# Altium PCB IR驱动.PcbDoc
Units mm, origin at the board's own origin, x right, y up, seen from the top; angles counter-clockwise.
Board outline 62.52 x 83.44 mm, 2 copper layers (Top Layer, Bottom Layer); 28 components, 77 nets, 84 pads, 10 vias.
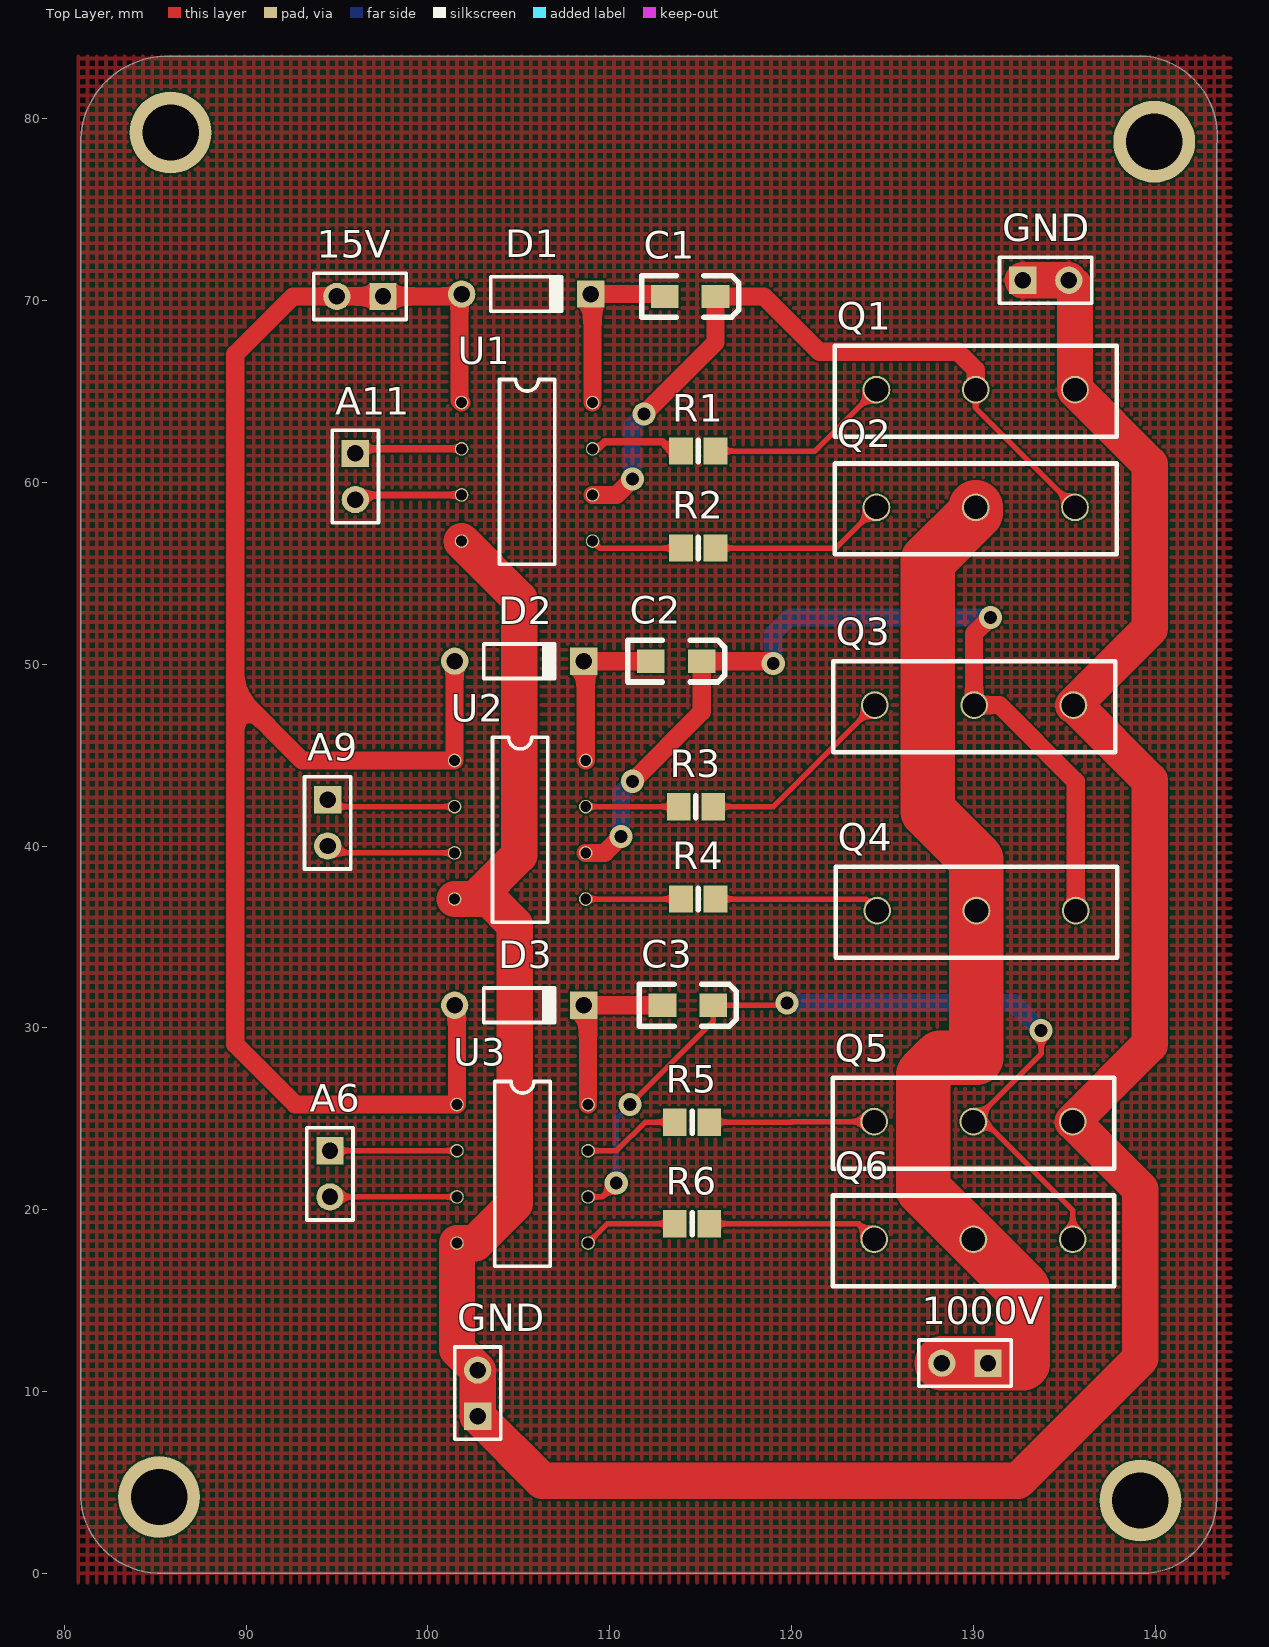
[diagram p0: Top Layer view]
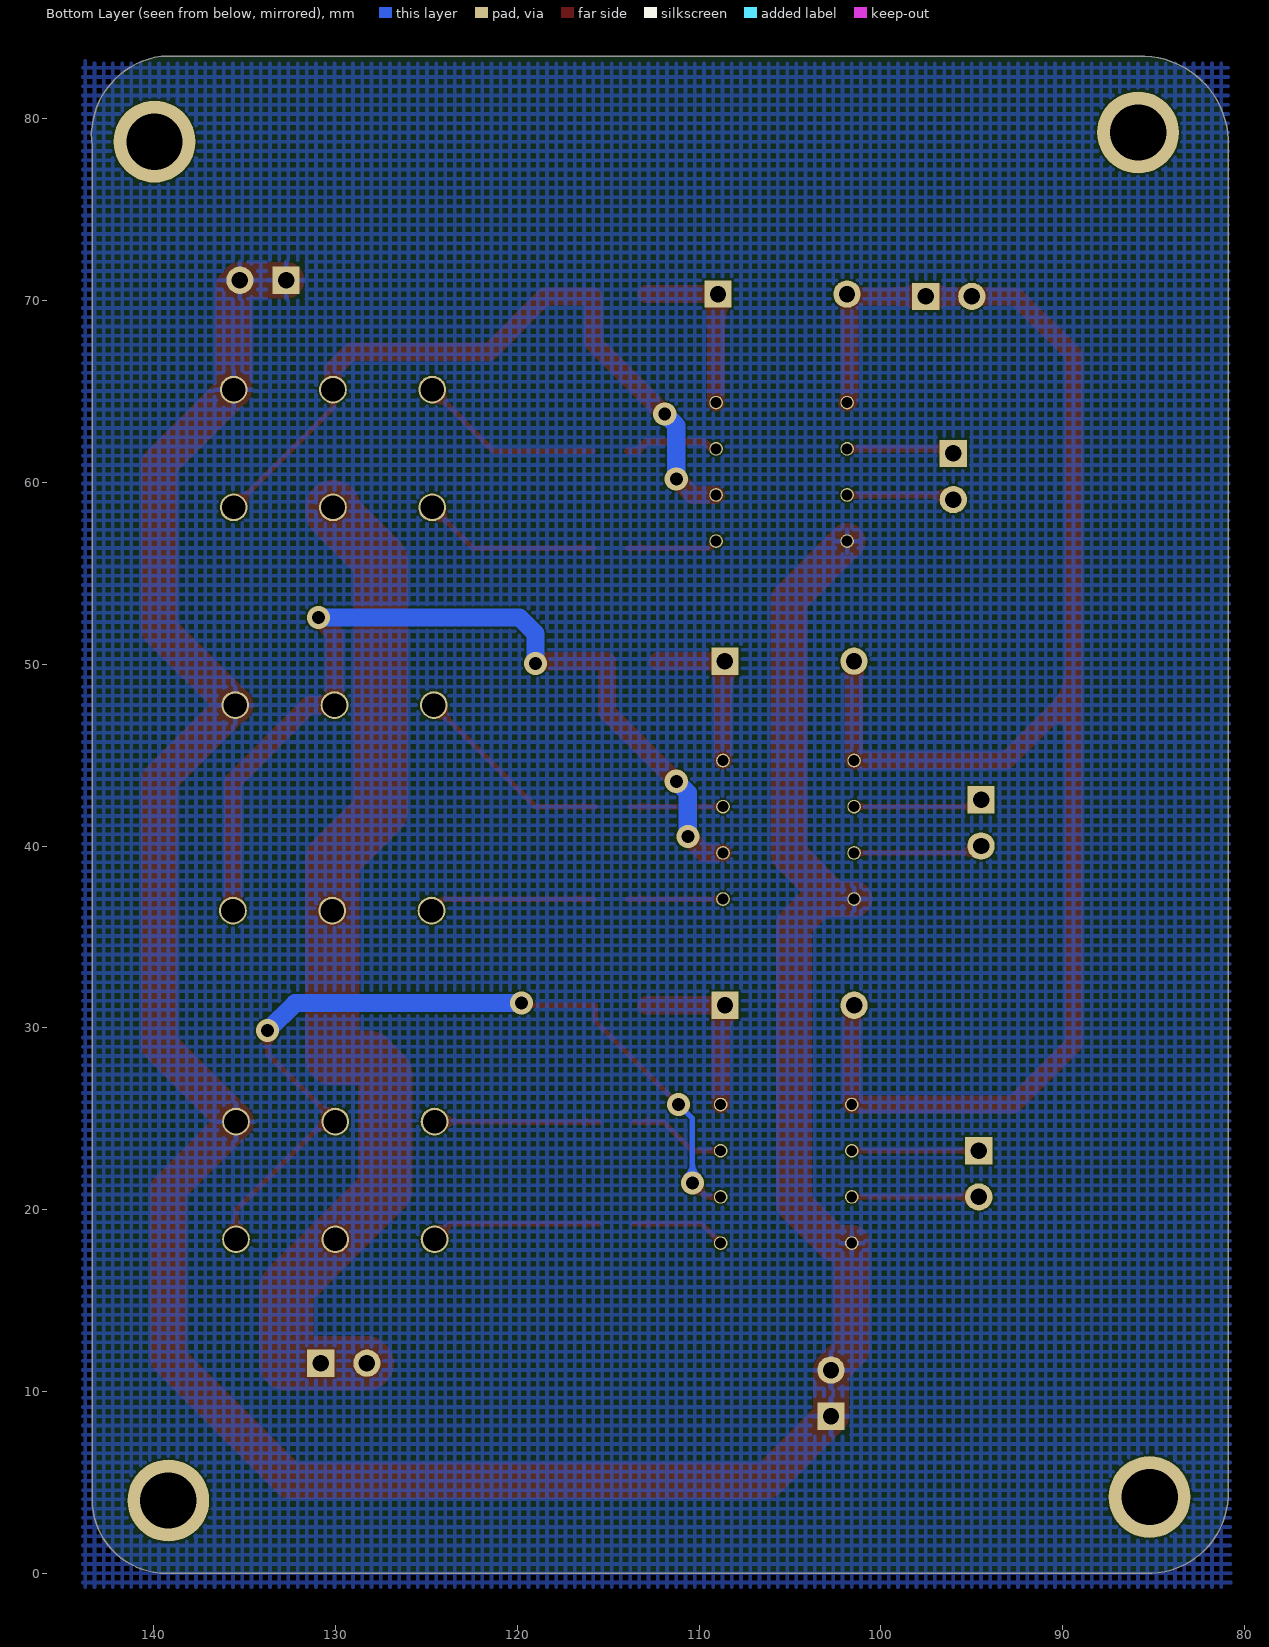
[diagram p1: Bottom Layer view, seen from below]

## Layer stack, top to bottom
Top Solder: solder mask 0.0102, Solder Resist, Dk 3.5
Top Layer: signal copper 0.0356
Dielectric 1: dielectric 0.32, FR-4, Dk 4.8
Bottom Layer: signal copper 0.0356
Bottom Solder: solder mask 0.0102, Solder Resist, Dk 3.5

## Board outline
80.899,4.191 ccw(c85.281,4.381) 85.471,0 139.319,0 ccw(c139.319,4.064) 143.383,4.064 143.383,78.486 ccw(c139.001,79.057) 139.573,83.439 85.852,83.439 ccw(c85.661,78.676) 80.899,78.867

## Design rules (kind name [scope] priority, off if disabled: settings)
Clearance GY1 [All] p1: gap=0.1 // GY1
Clearance [All] p2: gap=0.254
ComponentClearance [All] p1 off: gap=0.254 collisioncheckmode=3 verticalgap=0.254 showdistances=FALSE
HoleSize [All] p1: absolutevalues=TRUE maxlimit=4 minlimit=0.025 maxpercent=80.000 minpercent=20.000
PolygonConnect [All] p1: connectstyle=Relief reliefconductorwidth=0.254 reliefentries=4 polygonreliefangle="90 Angle" airgapwidth=0.254
RoutingVias [All] p1: holewidth=0.711 width=1.27 viastyle="Through Hole" minholewidth=0.711 minwidth=1.27 maxholewidth=0.711 maxwidth=1.27
SolderMaskExpansion [All] p1: expansion=0.102
UnpouredPolygon UnpouredPolygon_1 [All] p1:
UnpouredPolygon [InNet('GND')] p2:
Width 15V [InNet('15V')] p1: maxlimit=3 minlimit=0.254 preferedwidth=1.5
Width GND [InNet('GND')] p2: maxlimit=3 minlimit=0.1 preferedwidth=2.5
Width 1000V [InNet('1000V')] p3: maxlimit=3 minlimit=0.254 preferedwidth=0.254
Width VCC [InNet('VCC')] p4: maxlimit=2.5 minlimit=0.254 preferedwidth=0.254
Width [All] p5: maxlimit=1.5 minlimit=0.1 preferedwidth=0.3
27 further rules are at their usual default settings.

## Classes and differential pairs
component class aaa: 15V 1000V GND Q1 Q2 Q3 Q4 Q5 Q6 R1 R2 R3 R4 R5 R6 U1 U2 U3

## Components (designator, comment, footprint, x,y, rotation, side; value= is the part's Value field where it differs from the comment)
15V "Component_1" HDR1X2 97.536,70.231 r180 top (schematic designator *2)
1000V "Component_1" HDR1X2 130.81,11.557 r180 top (schematic designator *4)
A6 "Header 2" HDR1X2 94.615,23.241 r270 top (schematic designator P1)
A9 "Header 2" HDR1X2 94.488,42.545 r270 top (schematic designator P1)
A11 "Header 2" HDR1X2 96.012,61.595 r270 top (schematic designator P1)
C1 "Cap Pol2" 3216 115.824,70.231 r0 top (schematic designator C6)
C2 "Cap Pol2" 3216 115.062,50.165 r0 top (schematic designator C6)
C3 "Cap Pol2" 3216 115.697,31.242 r0 top (schematic designator C6)
D1 "Comment" DO-35 105.41,70.358 r0 top
D2 "Comment" DO-35 105.029,50.165 r0 top
D3 "Comment" DO-35 105.023,31.242 r0 top
GND "Component_1" HDR1X2 102.743,8.636 r90 top (schematic designator *3)
GND "Component_1" HDR1X2 132.715,71.12 r0 top (schematic designator *5)
Q1 "Component_1" PCBComponent_1 130.135,65.103 r0 top
Q2 "Component_1" PCBComponent_1 130.135,58.626 r0 top
Q3 "Component_1" PCBComponent_1 130.048,47.752 r0 top
Q4 "Component_1" PCBComponent_1 130.175,36.449 r0 top
Q5 "Component_1" PCBComponent_1 130.008,24.844 r0 top
Q6 "Component_1" PCBComponent_1 130.008,18.367 r0 top
R1 "Res2" 2012 115.824,61.722 r180 top (schematic designator R8)
R2 "Res2" 2012 115.824,56.388 r180 top (schematic designator R9)
R3 "Res2" 2012 115.697,42.164 r180 top (schematic designator R12)
R4 "Res2" 2012 115.824,37.084 r180 top (schematic designator R13)
R5 "Res2" 2012 115.483,24.813 r180 top (schematic designator R14)
R6 "Res2" 2012 115.483,19.225 r180 top (schematic designator R15)
U1 "IR2101" IR2101 101.854,64.389 r0 top
U2 "IR2101" IR2101 101.473,44.704 r0 top
U3 "IR2101" IR2101 101.6,25.781 r0 top

## Footprints (in the part's own frame and the unit in brackets; to place one, negate y for a bottom-side part, rotate by r counter-clockwise, add the part's x,y. Pads: shape width x height; smd on the part's side, far side on the other; paste and mask are expansions set on the pad)
2012 [mm]
  rect 1.3x1.5 smd: 1(0,0) 2(1.9,0)
  silkscreen extent 0.95,-0.6 0.95,0.6
3216 [mil]
  rect 60x50 smd: 1(0,0) 2(-110,0)
  silkscreen extent -160,-45 50,45
DO-35 [mm] "Diode, Axial; Body 3.8 x 1.9 mm (LxDia. max), Lead Dia. 0.53 mm (max)"
  round 1.5 hole 0.9: 1(-3.55,0)
  rect 1.5x1.5 hole 0.9: 2(3.55,0)
  silkscreen extent -1.95,-0.95 2.05,0.95
HDR1X2 [mm] "Connector; Header; 2 Position"
  rect 1.5x1.5 hole 0.9: 1(0,0)
  round 1.5 hole 0.9: 2(2.54,0)
  silkscreen extent -1.27,-1.27 3.81,1.27
IR2101 [mm]
  round 0.75 hole 0.6: 1(0,0) 2(0,-2.54) 3(0,-5.08) 4(0,-7.62) 5(7.21,-7.62) 6(7.21,-5.08) 7(7.21,-2.54) 8(7.21,0)
  silkscreen extent 2.08,-8.89 5.13,1.27
PCBComponent_1 [mil]
  round 60 hole 51.18: D(0,0) G(-215,0) S(215,0)
  silkscreen extent -305,-102 305,95

## Part data
A6 A9 A11: "Header, 2-Pin"
C1 C2 C3: "Polarized Capacitor (Axial)"
R1 R2 R3 R4 R5 R6: "Resistor"

## Free pads (board coordinates)
  round 4.5 hole 3.1: 2(85.217,4.191) 2(85.852,79.248) 2(139.192,4) 2(139.954,78.74)

## Via types
v1: diameter 1.27, hole 0.711, Top Layer to Bottom Layer, 10 vias

## Nets (pads, with @x,y where several pads share a name; then routed paths per layer and width w, separated by ;. In a path a pad name is that pad's centre, name@x,y a point inside that pad or via, vN(x,y) a via of type N, cw(c..) or ccw(c..) an arc to the next point about the centre after c; other vN are vias at no path point)
15V: 15V.1 15V.2 D1.1 D2.1 D3.1 U1.1 U2.1 U3.1 | length 95.5
  Top Layer w1: D2.1 101.473,50.159 U2.1 93.091,44.704 89.408,48.387 ; D3.1@101.6,31.115 U3.1 92.71,25.781 89.408,29.083 89.408,48.387 ; U1.1 101.733,64.51 101.733,70.231 15V.1 15V.2 92.583,70.231 89.408,67.056 89.408,48.387
1000V: 1000V.1 1000V.2 Q2.D Q4.D Q6.D | length 58.4
  Top Layer w3: 1000V.2 1000V.1 132.715,11.557 132.715,15.66 Q6.D 127.254,21.121 127.254,27.432 128.173,28.351 130.175,28.351 Q4.D 130.175,39.243 127.508,41.91 127.508,55.706 130.135,58.333 Q2.D
+3.3V: 
+5V: 
BOOT0: 
BOOT1: 
GND: GND.1 GND.2 Q1.S Q3.S Q5.S U1.4 U2.4 U3.4 | length 167.6
  Top Layer w2: U1.4 105.029,53.594 105.029,39.497 102.616,37.084 U2.4 103.378,37.084 104.775,35.687 104.775,20.32 102.616,18.161 U3.4 101.6,12.319 102.743,11.176 102.743,8.636 106.299,5.08 132.461,5.08 139.192,11.811 139.192,21.121 Q5.S 139.7,29.075 139.7,43.621 Q3.S@135.569,47.752 ; GND.1@132.715,71.12 135.255,71.12 135.596,70.779 Q1.S 139.7,60.999 139.7,51.943 Q3.S
IN1: Q1.G R1.1 | length 10.3
  Top Layer w0.3: R1.1 121.293,61.722 Q1.G
IN2: Q2.G R2.1 | length 9.8
  Top Layer w0.3: R2.1 122.436,56.388 Q2.G
IN3: Q3.G R3.1 | length 11.2
  Top Layer w0.3: R3.1 118.999,42.164 Q3.G
IN4: Q4.G R4.1 | length 9.2
  Top Layer w0.3: R4.1 124.079,37.084 Q4.G
IN5: Q5.G R5.1 | length 9.1
  Top Layer w0.3: R5.1 119.99,24.813 120.021,24.844 Q5.G
IN6: Q6.G R6.1 | length 9.4
  Top Layer w0.3: R6.1 123.689,19.225 Q6.G
JNTRST: 
JTCK: 
JTD0: 
JTD1: 
JTDI: 
JTDO: 
JTMS: 
JTRST: 
KEY0: 
KEY1: 
LCD_BL: 
LCD_CS: 
LCD_D0: 
LCD_D1: 
LCD_D2: 
LCD_D5: 
LCD_D6: 
LCD_D7: 
LCD_D8: 
LCD_D9: 
LCD_D10: C1.2 D1.2 U1.8 | length 10
  Top Layer w0.4: D1.2 D1.2@109.064,70.254
  Top Layer w1: D1.2 C1.2@112.903,70.358 ; U1.8 D1.2@109.064,70.254
LCD_D12: C2.2 D2.2 U2.8 | length 9.2
  Top Layer w1: U2.8 108.683,50.061 D2.2 C2.2
LCD_D13: 
LCD_D14: 
LCD_D15: C3.2 D3.2 U3.8 | length 9.9
  Top Layer w1: U3.8 108.81,31.005 D3.2 C3.2
LCD_RD: 
LCD_RS: 
LCD_WR: 
NetC1_1: 
NetC19_1: 
NetQ1_D: C1.1 Q1.D Q2.S U1.6 | length 40.3
  Top Layer w0.3: Q1.D 130.135,64.087 Q2.S
  Top Layer w1: U1.6 110.363,59.309 v1(111.252,60.198) ; v1(111.887,63.754) 115.824,67.691 C1.1 118.491,70.231 121.539,67.183 129.159,67.183 130.135,66.207 Q1.D
  Bottom Layer w1: v1(111.252,60.198) 111.252,63.119 v1(111.887,63.754)
NetQ3_D: C2.1 Q3.D Q4.S U2.6 | length 51.4
  Top Layer w1: U2.6 109.728,39.624 v1(110.617,40.513) ; v1(111.252,43.561) 115.062,47.371 C2.1 118.872,50.165 v1(118.999,50.038) ; v1(130.937,52.578) 130.048,51.689 Q3.D 131.445,47.752 135.636,43.561 Q4.S
  Bottom Layer w1: v1(110.617,40.513) 110.617,42.926 v1(111.252,43.561) ; v1(118.999,50.038) 118.999,51.689 119.888,52.578 v1(130.937,52.578)
NetQ5_D: C3.1 Q5.D Q6.S U3.6 | length 48.2
  Top Layer w0.3: U3.6 109.601,20.701 v1(110.363,21.463) ; v1(111.125,25.781) 115.697,30.353 C3.1 119.634,31.242 v1(119.761,31.369) ; v1(133.731,29.845) 133.731,28.567 Q5.D 130.604,24.844 135.469,19.979 Q6.S
  Bottom Layer w0.3: v1(110.363,21.463) 110.363,25.019 v1(111.125,25.781)
  Bottom Layer w1: v1(119.761,31.369) 132.207,31.369 v1(133.731,29.845)
NetR8_2: R1.2 U1.7 | length 5.2
  Top Layer w0.4: U1.7 109.347,61.849 109.728,62.23 112.903,62.23 113.411,61.722 R1.2
NetR9_2: R2.2 U1.5 | length 5
  Top Layer w0.3: U1.5 109.445,56.388 R2.2
NetR12_2: R3.2 U2.7 | length 5.1
  Top Layer w0.3: U2.7 R3.2
NetR13_2: R4.2 U2.5 | length 5.2
  Top Layer w0.3: U2.5 R4.2
NetR14_2: R5.2 U3.7 | length 5.4
  Top Layer w0.3: U3.7 110.388,23.241 111.96,24.813 R5.2
NetR15_2: R6.2 U3.5 | length 5.2
  Top Layer w0.3: U3.5 109.874,19.225 R6.2
PA1: 
PA5: A6.2 U3.3 | length 7
  Top Layer w0.3: A6.2 U3.3
PA6: A6.1 U3.2 | length 7
  Top Layer w0.3: A6.1 U3.2
PA8: A9.2 U2.3 | length 7.1
  Top Layer w0.3: A9.2 94.869,39.624 U2.3
PA9: A9.1 U2.2 | length 7.1
  Top Layer w0.3: A9.1 94.869,42.164 U2.2
PA10: A11.2 U1.3 | length 5.9
  Top Layer w0.4: A11.2 96.266,59.309 U1.3
PA11: A11.1 U1.2 | length 5.9
  Top Layer w0.4: A11.1 96.266,61.849 U1.2
PA12: 
PC11: 
PC12: 
PC13: 
PC14: 
PC15: 
PD0: 
PD1: 
PD2: 
RESET: 
T_CS: 
T_MISO: 
T_MOSI: 
T_PEN: 
T_SCK: 
VCC: 
VCC_3.3: 
VCC_5: 

## Polygon pours and split planes (outlines as drawn)
GND on Top Layer "ss" (hatched 90Degree grid 0.508 track 0.203, remove dead copper, pour order 42): 80.772,83.439 144.145,83.439 144.145,0.127 143.51,-0.508 80.772,-0.508
GND on Bottom Layer "s" (hatched 90Degree grid 0.508 track 0.203, remove dead copper, pour order 44): 80.899,83.058 143.637,83.058 143.891,83.312 143.891,-0.762 81.026,-0.762 80.772,-1.016

## Silkscreen, mask and mechanical layers (free items; w line width, h text height)
Bottom Solder:
  the board outline again, w0.254